# Altium PCB PCB1.PcbDoc
Units mm, origin at the board's own origin, x right, y up, seen from the top; angles counter-clockwise.
Board outline 64.77 x 94.74 mm, 2 copper layers (Top Layer, Bottom Layer); 44 components, 81 nets, 288 pads, 75 vias.
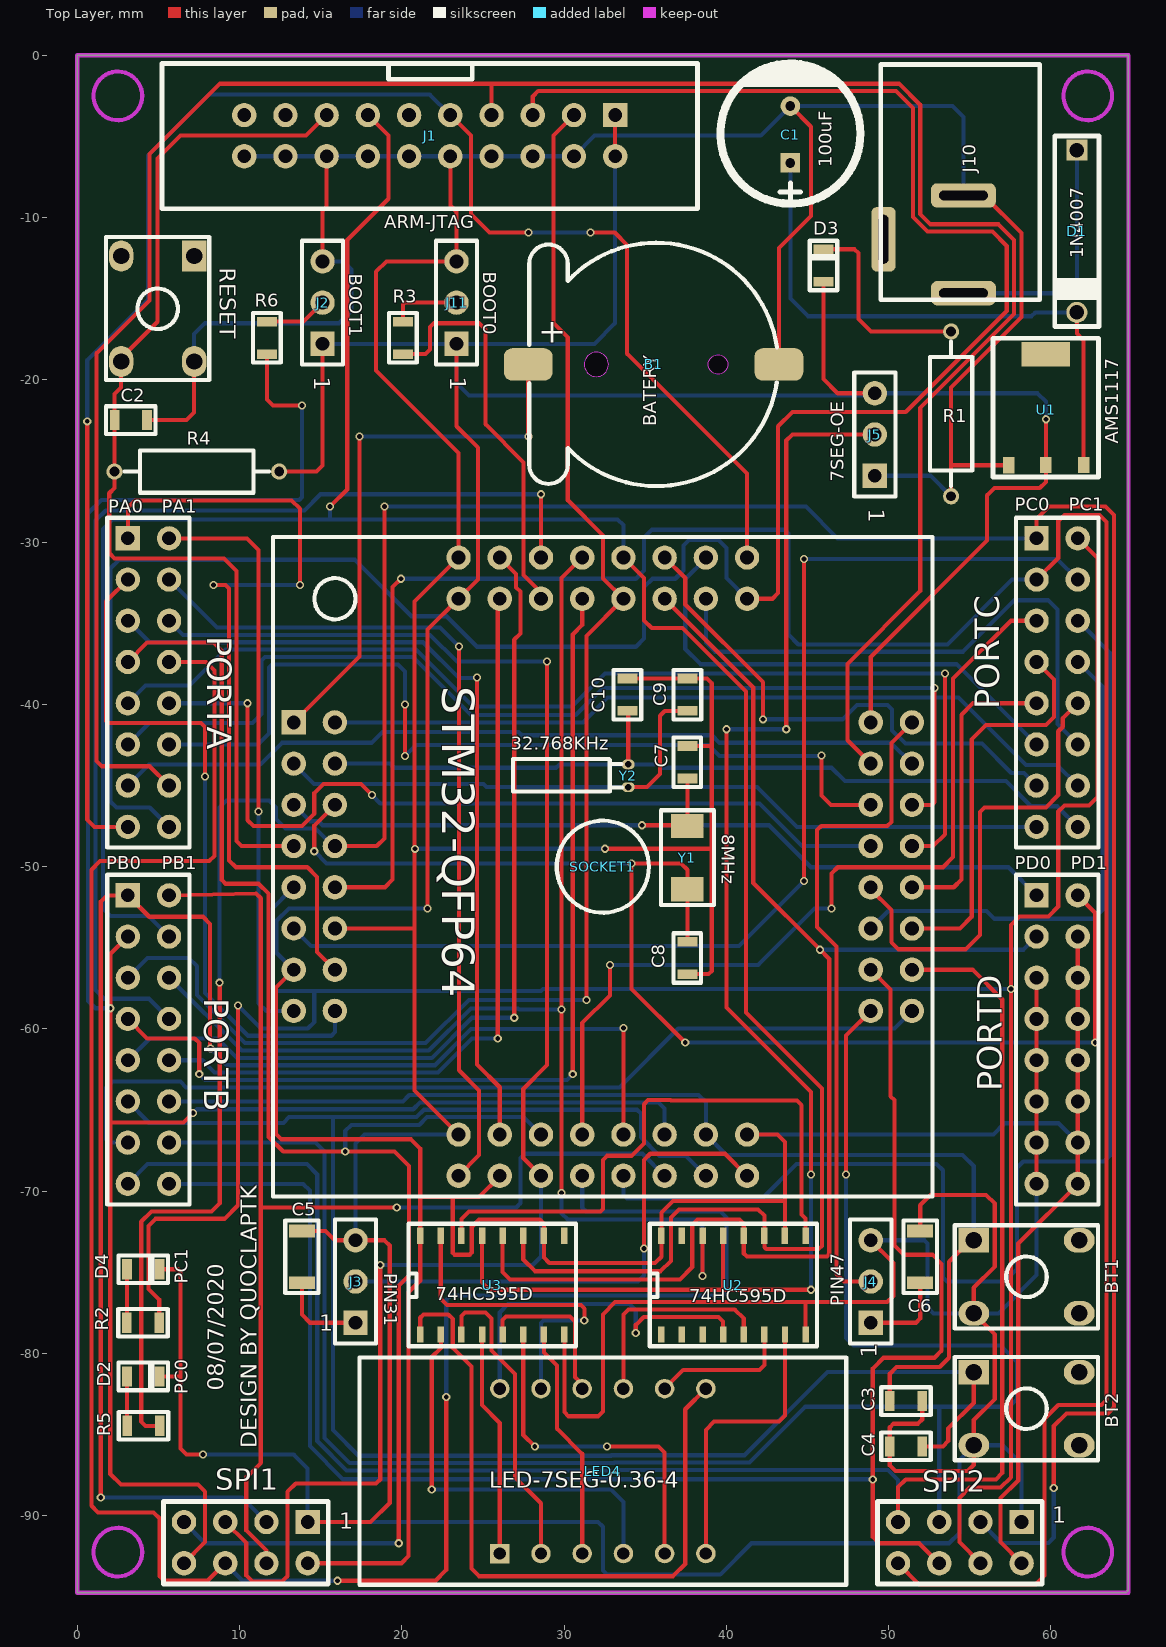
[diagram p0: Top Layer view]
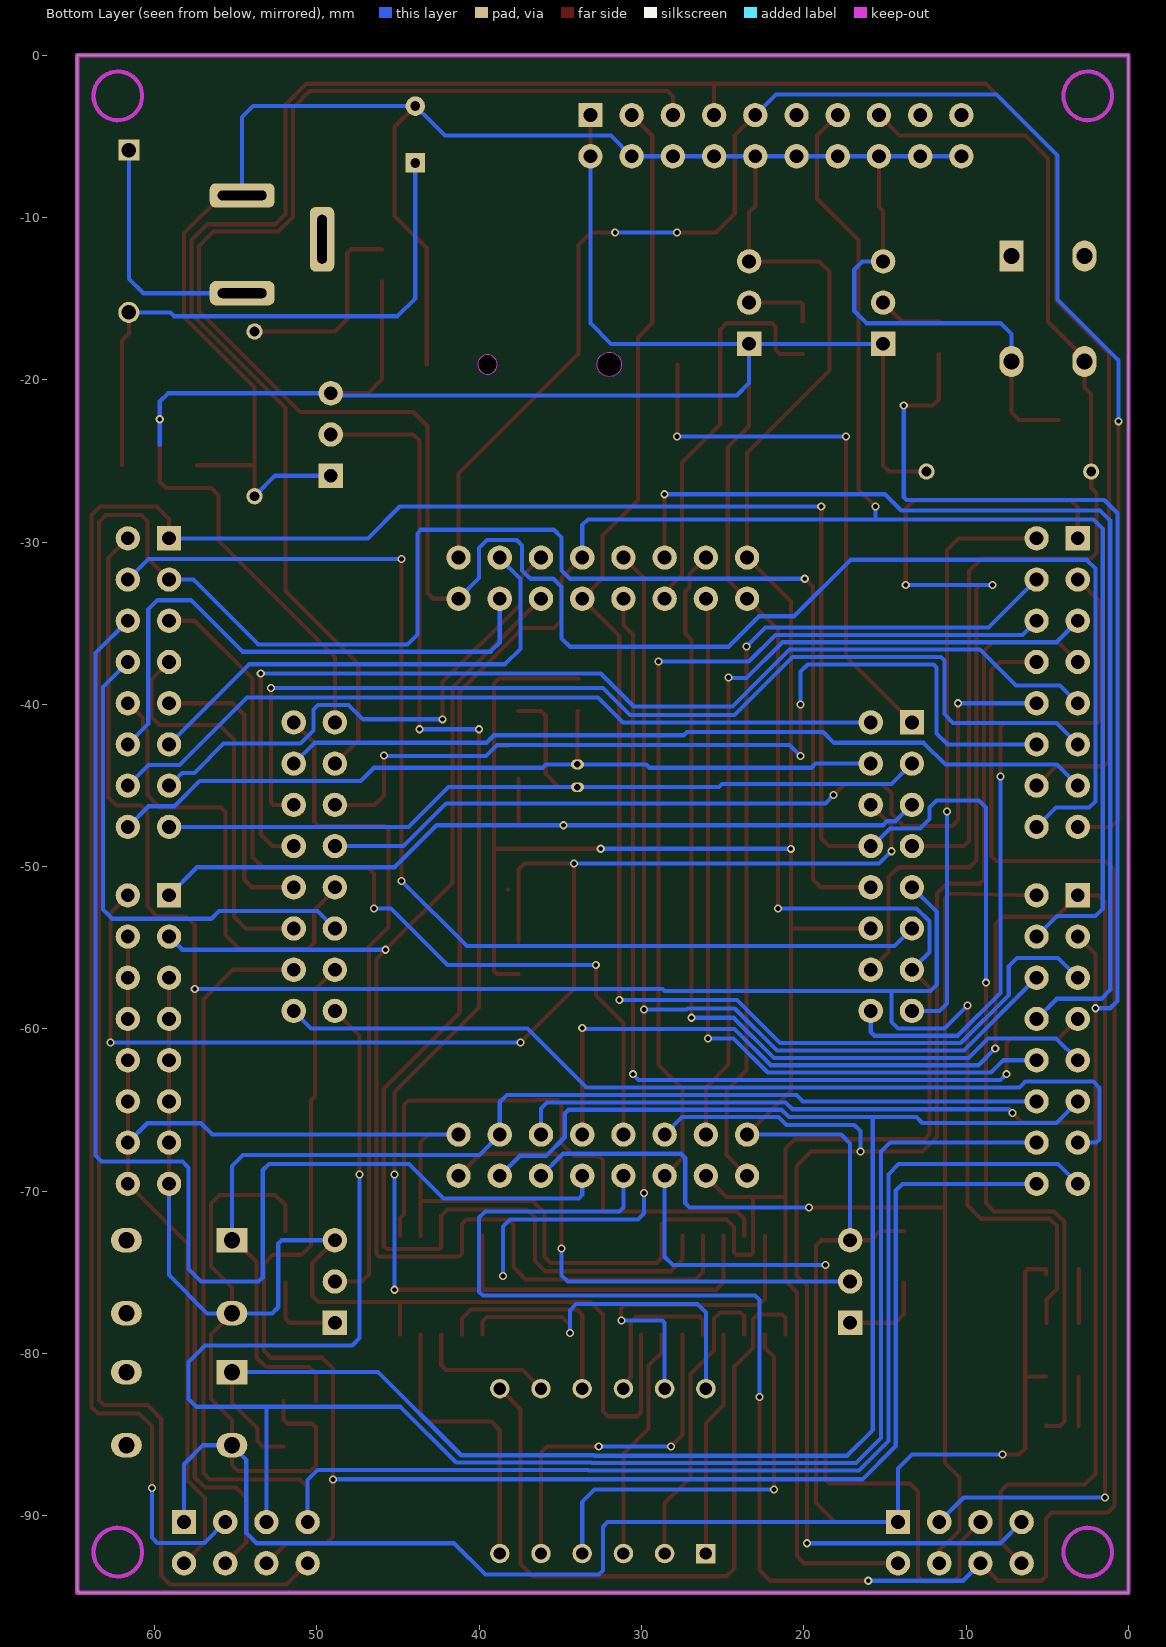
[diagram p1: Bottom Layer view, seen from below]

## Layer stack, top to bottom
Top Solder: solder mask 0.0102, Solder Resist, Dk 3.5
Top Layer: signal copper 0.0356
Dielectric 1: dielectric 0.32, FR-4, Dk 4.8
Bottom Layer: signal copper 0.0356
Bottom Solder: solder mask 0.0102, Solder Resist, Dk 3.5

## Board outline
0,-94.742 64.621,-94.742 64.77,-94.593 64.77,0 0,0

## Design rules (kind name [scope] priority, off if disabled: settings)
Clearance [All] p1: gap=0.2 ignorepadtopadclearanceinfootprint=FALSE
PolygonConnect [All] p1: connectstyle=Relief reliefconductorwidth=0.254 reliefentries=4 polygonreliefangle="90 Angle" airgapwidth=0.254
RoutingVias [All] p1: holewidth=0.3 width=0.5 viastyle="Through Hole" minholewidth=0.3 minwidth=0.5 maxholewidth=0.3 maxwidth=0.5
SolderMaskExpansion [All] p1: expansion=0.102
Width [All] p1: maxlimit=3 minlimit=0.254 preferedwidth=0.254
30 further rules are at their usual default settings.

## Components (designator, comment, footprint, x,y, rotation, side; value= is the part's Value field where it differs from the comment)
B1 "BATERY" CR1220 35.687,-19.05 r270 top
BT1 "Button Hole" BUTTON_HOLE_5.0mm 58.495,-75.275 r90 top
BT2 "Button Hole" BUTTON_HOLE_5.0mm 58.495,-83.403 r90 top
C1 "100uF" CAP_RAD_7mm 43.942,-4.826 r90 top
C2 "103" C0805 3.302,-22.479 r180 top
C3 "103" C0805 51.07,-82.931 r0 top
C4 "103" C0805 51.07,-85.725 r180 top
C5 "2.2uF" C1206 13.843,-74.041 r90 top
C6 "2.2uF" C1206 51.943,-74.041 r90 top
C7 "22pF" C0805 37.592,-43.561 r90 top
C8 "22pF" C0805 37.592,-55.626 r270 top
C9 "22pF" C0805 37.6,-39.4 r90 top
C10 "22pF" C0805 33.9,-39.4 r90 top
D1 "1N4007" DO-41 61.595,-10.842 r270 top
D2 "PC0" L0805RED 4.064,-82.042 r0 top
D3 "LED0805" L0805RED 46.609,-12.954 r90 top
D4 "PC1" L0805RED 4.064,-75.438 r0 top
J1 "ARM-JTAG" IDC_CONNECTOR_20_2.54 21.717,-4.953 r270 top
J2 "BOOT1" "Header 3x1 TH Pitch 2.54mm" 15.113,-15.24 r90 top
J3 "PIN31" "Header 3x1 TH Pitch 2.54mm" 17.145,-75.565 r90 top
J4 "PIN47" "Header 3x1 TH Pitch 2.54mm" 48.895,-75.565 r90 top
J5 "7SEG-OE" "Header 3x1 TH Pitch 2.54mm" 49.149,-23.368 r90 top
J10 "Connector" DC_K375A_Power 41.61,-7.361 r180 top
J11 "BOOT0" "Header 3x1 TH Pitch 2.54mm" 23.368,-15.24 r90 top
LED4 "LED-7SEG-0.36-4" LED-7SEG-0.36-4 32.385,-87.249 r0 top
PORTA "Header 8x2 TH Pitch 2.54mm" "Header 8x2 TH Pitch 2.54mm" 4.385,-38.657 r0 top
PORTB "Header 8x2 TH Pitch 2.54mm" "Header 8x2 TH Pitch 2.54mm" 4.385,-60.657 r0 top
PORTC "Header 8x2 TH Pitch 2.54mm" "Header 8x2 TH Pitch 2.54mm" 60.385,-38.657 r0 top
PORTD "Header 8x2 TH Pitch 2.54mm" "Header 8x2 TH Pitch 2.54mm" 60.385,-60.657 r0 top
R1 "330" RES-0.25W-H-MF 53.848,-22.098 r270 top
R2 "330" R0805 5.048,-78.105 r0 top
R3 "4k7" R0805 20.066,-18.415 r270 top
R4 "10K" RES-0.25W-H-MF 7.366,-25.654 r180 top
R5 "330" R0805 5.08,-84.455 r0 top
R6 "4k7" R0805 11.684,-18.415 r270 top
RESET "Button Hole" BUTTON_HOLE_5.0mm 4.953,-15.621 r0 top
SOCKET1 "STM32-QFP64" SOCKET-ADAPTER-OTQ-64-05-03 32.385,-50 r0 top
SPI1 "Header 4x2 TH Pitch 2.54mm" "Header 4x2 TH Pitch 2.54mm" 10.385,-91.657 r270 top
SPI2 "Header 4x2 TH Pitch 2.54mm" "Header 4x2 TH Pitch 2.54mm" 54.385,-91.657 r270 top
U1 "AMS1117" SOT223-3 59.69,-21.79 r0 top
U2 "74HC595D" SO16 40.132,-75.692 r90 top
U3 "74HC595D" SO16 25.273,-75.692 r90 top
Y1 "8MHz" SMD5032 37.592,-47.498 r90 top
Y2 "32.768KHz" DT-26 34.1,-44.4 r0 top

## Footprints (in the part's own frame and the unit in brackets; to place one, negate y for a bottom-side part, rotate by r counter-clockwise, add the part's x,y. Pads: shape width x height; smd on the part's side, far side on the other; paste and mask are expansions set on the pad)
BUTTON_HOLE_5.0mm [mm]
  rect 1.5x1.9 hole 1: 1(2.25,3.25)
  oval 1.5x1.9 hole 1: 2(2.25,-3.25) 3(-2.25,3.25) 4(-2.25,-3.25)
  silkscreen extent -3.18,-4.4 3.17,4.43, body extent -3,-3.86 3,3.86, height 5
C0805 [mm]
  rect 0.6x1.24 smd: 1(-1,0) 2(1,0)
  silkscreen extent -1.52,-0.85 1.53,0.85, body extent -1,-0.6 1,0.6, height 1
C1206 [mm]
  rect 0.8x1.6 smd: 1(-1.6,0) 2(1.6,0)
  silkscreen extent -2.22,-1.02 2.22,1.02, body extent -1.6,-0.8 1.6,0.8, height 0.75
CAP_RAD_7mm [mm]
  rect 1.2x1.2 hole 0.6: 1(-1.805,0)
  round 1.2 hole 0.6: 2(1.695,0)
  silkscreen extent -4.32,-4.32 4.32,4.31, body extent -4.06,-4 3.94,4, height 11.33
CR1220 [mm]
  rrect50% 2x3 smd: 1(0,-7.9) 2(0,7.55)
  Keep-Out Layer board cut-out: -0.75,-3.7 -0.693,-3.987 -0.53,-4.23 -0.287,-4.393 0,-4.45 0,-4.45 0.287,-4.393 0.53,-4.23 0.693,-3.987 0.75,-3.7 0.75,-3.7 0.693,-3.413 0.53,-3.17 0.287,-3.007 0,-2.95 0,-2.95 -0.287,-3.007 -0.53,-3.17 -0.693,-3.413 -0.75,-3.7
  Keep-Out Layer board cut-out: 0,3.2 -0.23,3.246 -0.424,3.376 -0.554,3.57 -0.6,3.8 -0.6,3.8 -0.554,4.03 -0.424,4.224 -0.23,4.354 0,4.4 0,4.4 0.23,4.354 0.424,4.224 0.554,4.03 0.6,3.8 0.6,3.8 0.554,3.57 0.424,3.376 0.23,3.246 0,3.2
  silkscreen extent -7.5,-7.84 7.5,7.43, body extent -7.5,-9.42 7.5,9.07, height 4.04
DC_K375A_Power [mm]
  rrect50% 4x1.5 hole 0.6 slot 3 at 0 deg: 1(-13,7.3) 2(-13,1.275)
  rrect50% 1.5x4 hole 0.6 slot 3 at 90 deg: 3(-8.075,3.975)
  silkscreen extent -17.7,-6.8 -7.9,7.7, body extent -17.7,-6.8 -7.9,7.7, height 11
DO-41 [mm]
  rect 1.3x1.3 hole 0.9: 1(-5,0)
  round 1.3 hole 0.9: 2(5,0)
  silkscreen extent -5.88,-1.36 5.88,1.36, body extent -5.43,-1.36 5.43,1.36, height 3.36
DT-26 [mm]
  oval 0.8x0.6 hole 0.4: 1(-0.15,0.7) 2(-0.15,-0.7)
  silkscreen extent -7.24,-0.98 -0.54,1.02, body extent -7.14,-1 0,1, height 2
"Header 3x1 TH Pitch 2.54mm" [mm]
  rect 1.5x1.5 hole 0.85: 1(-2.54,0)
  round 1.5 hole 0.85: 2(0,0) 3(2.54,0)
  silkscreen extent -3.81,-1.27 3.81,1.27, body extent -3.81,-1.27 3.81,1.27, height 8.89
"Header 4x2 TH Pitch 2.54mm" [mm]
  rect 1.5x1.5 hole 0.85: 1(-1.27,3.81)
  round 1.5 hole 0.85: 2(1.27,3.81) 3(-1.27,1.27) 4(1.27,1.27) 5(-1.27,-1.27) 6(1.27,-1.27) 7(-1.27,-3.81) 8(1.27,-3.81)
  silkscreen extent -2.54,-5.08 2.54,5.08, body extent -2.54,-5.08 2.54,5.08, height 8.89
"Header 8x2 TH Pitch 2.54mm" [mm]
  rect 1.5x1.5 hole 0.85: 1(-1.27,8.89)
  round 1.5 hole 0.85: 2(1.27,8.89) 3(-1.27,6.35) 4(1.27,6.35) 5(-1.27,3.81) 6(1.27,3.81) 7(-1.27,1.27) 8(1.27,1.27) 9(-1.27,-1.27) 10(1.27,-1.27) 11(-1.27,-3.81) 12(1.27,-3.81) 13(-1.27,-6.35) 14(1.27,-6.35) 15(-1.27,-8.89) 16(1.27,-8.89)
  silkscreen extent -2.54,-10.16 2.54,10.16, body extent -2.54,-10.16 2.54,10.16, height 8.89
IDC_CONNECTOR_20_2.54 [mm]
  rect 1.5x1.5 hole 0.85: 1(-1.27,11.43)
  round 1.5 hole 0.85: 2(1.27,11.43) 3(-1.27,8.89) 4(1.27,8.89) 5(-1.27,6.35) 6(1.27,6.35) 7(-1.27,3.81) 8(1.27,3.81) 9(-1.27,1.27) 10(1.27,1.27) 11(-1.27,-1.27) 12(1.27,-1.27) 13(-1.27,-3.81) 14(1.27,-3.81) 15(-1.27,-6.35) 16(1.27,-6.35) 17(-1.27,-8.89) 18(1.27,-8.89) 19(-1.27,-11.43) 20(1.27,-11.43)
  silkscreen extent -4.45,-16.5 4.5,16.5, body extent -4.47,-16.6 4.42,16.6, height 9
L0805RED [mm]
  rect 0.6x1.24 smd: 1(-1,0.625) 2(1,0.625)
  silkscreen extent -1.53,-0.23 1.52,1.47, body extent -1,0 1,1.25, height 1.1
LED-7SEG-0.36-4 [mm]
  rect 1.2x1.2 hole 0.762: 1(-6.35,-5.08)
  round 1.2 hole 0.762: 2(-3.81,-5.08) 3(-1.27,-5.08) 4(1.27,-5.08) 5(3.81,-5.08) 6(6.35,-5.08) 7(6.35,5.08) 8(3.81,5.08) 9(1.27,5.08) 10(-1.27,5.08) 11(-3.81,5.08) 12(-6.35,5.08)
  silkscreen extent -15,-7 15,7
R0805 [mm]
  rect 0.6x1.24 smd: 1(-2,0) 2(0,0)
  silkscreen extent -2.53,-0.85 0.53,0.85, body extent -2,-0.62 0,0.62, height 0.45
RES-0.25W-H-MF [mm]
  round 1 hole 0.6: 1(-5.075,0) 2(5.075,0)
  silkscreen extent -4.45,-1.3 4.45,1.3, body extent -5.35,-1.3 5.36,1.3, height 2.69
SMD5032 [mm]
  rect 1.5x2 smd: 1(-3.9,0) 2(0,0)
  silkscreen extent -4.87,-1.65 0.97,1.63, body extent -4.45,-1.6 0.55,1.6, height 1.2
SO16 [mm]
  rect 1x0.4 smd: 1(-3.137,4.14) 2(-3.137,2.87) 3(-3.137,1.6) 4(-3.137,0.33) 5(-3.137,-0.94) 6(-3.137,-2.21) 7(-3.137,-3.48) 8(-3.137,-4.75) 9(2.948,-4.748) 10(2.948,-3.478) 11(2.948,-2.208) 12(2.948,-0.938) 13(2.948,0.332) 14(2.948,1.602) 15(2.948,2.872) 16(2.948,4.142)
  silkscreen extent -3.86,-5.46 3.68,4.85, body extent -3.17,-5.29 2.97,4.68, height 1.75
SOCKET-ADAPTER-OTQ-64-05-03 [mm]
  rect 1.5x1.5 hole 0.85: 1(-19.05,8.89)
  round 1.5 hole 0.85: 2(-16.51,8.89) 3(-19.05,6.35) 4(-16.51,6.35) 5(-19.05,3.81) 6(-16.51,3.81) 7(-19.05,1.27) 8(-16.51,1.27) 9(-19.05,-1.27) 10(-16.51,-1.27) 11(-19.05,-3.81) 12(-16.51,-3.81) 13(-19.05,-6.35) 14(-16.51,-6.35) 15(-19.05,-8.89) 16(-16.51,-8.89) 17(-8.89,-19.05) 18(-8.89,-16.51) 19(-6.35,-19.05) 20(-6.35,-16.51) 21(-3.81,-19.05) 22(-3.81,-16.51) 23(-1.27,-19.05) 24(-1.27,-16.51) 25(1.27,-19.05) 26(1.27,-16.51) 27(3.81,-19.05) 28(3.81,-16.51) 29(6.35,-19.05) 30(6.35,-16.51) 31(8.89,-19.05) 32(8.89,-16.51) 33(19.05,-8.89) 34(16.51,-8.89) 35(19.05,-6.35) 36(16.51,-6.35) 37(19.05,-3.81) 38(16.51,-3.81) 39(19.05,-1.27) 40(16.51,-1.27) 41(19.05,1.27) 42(16.51,1.27) 43(19.05,3.81) 44(16.51,3.81) 45(19.05,6.35) 46(16.51,6.35) 47(19.05,8.89) 48(16.51,8.89) 49(8.89,19.05) 50(8.89,16.51) 51(6.35,19.05) 52(6.35,16.51) 53(3.81,19.05) 54(3.81,16.51) 55(1.27,19.05) 56(1.27,16.51) 57(-1.27,19.05) 58(-1.27,16.51) 59(-3.81,19.05) 60(-3.81,16.51) 61(-6.35,19.05) 62(-6.35,16.51) 63(-8.89,19.05) 64(-8.89,16.51)
  silkscreen extent -20.32,-20.32 20.32,20.32, body extent -20.32,-20.32 20.32,20.32, height 9.5
SOT223-3 [mm]
  rect 0.7x1 smd: 1(-2.3,-3.475) 2(0,-3.45) 3(2.325,-3.45)
  rect 3x1.5 smd: 4(0,3.375)
  silkscreen extent -3.25,-4.2 3.25,4.35, body extent -3.25,-3.5 3.25,3.5, height 1.7

## Part data
B1: library part Batery
C1: library part Capacitor(Radian)
C2 C3 C4 C7 C8 C9 C10: library part C0805
C5 C6: library part C1206
D2 D4: library part LED0805
J1: library part IDC_2.54_10x2
J2 J3 J4 J5 J11: library part "Header 3x1 TH Pitch 2.54mm"
J10: library part JackDC
R1 R4: library part "Resistors THD"
R2 R3 R5 R6: library part "Resistor SMD"
SOCKET1: library part SOCKET-ADAPTER-OTQ-64-05-03
U1: library part AMS1117(SOT-223)
Y1: library part Crystal
Y2: library part "Crystal 32.768KHz"

## Via types
v1: diameter 0.5, hole 0.3, Top Layer to Bottom Layer, 75 vias

## Nets (pads, with @x,y where several pads share a name; then routed paths per layer and width w, separated by ;. In a path a pad name is that pad's centre, name@x,y a point inside that pad or via, vN(x,y) a via of type N, cw(c..) or ccw(c..) an arc to the next point about the centre after c; other vN are vias at no path point)
3.3V: D3.1 J1.1 J1.2 J2.1 J5.3 J11.1 PORTD.4 PORTD.6 PORTD.8 PORTD.10 PORTD.12 PORTD.14 PORTD.16 R4.1 SOCKET1.13 SOCKET1.19 SOCKET1.32 SOCKET1.48 SOCKET1.64 SPI1.2 SPI2.2 U1.2 U2.10 U2.16 U3.10 U3.16 | length 327
  Top Layer w0.254: R4.1@12.187,-25.654 R4.1 14.732,-25.654 15.113,-25.273 J2.1 ; SOCKET1.13 12.243,-57.442 12.243,-66.472 12.573,-66.802 20.574,-66.802 21.131,-67.359 21.131,-70.358 ; SPI1.2 19.976,-92.927 20.422,-92.481 20.422,-76.225 21.131,-75.516 U3.16 21.131,-70.358 ; v1(21.59,-52.578) 21.59,-35.395 SOCKET1.64 24.689,-32.296 24.689,-24.181 23.368,-22.86 J11.1 ; SOCKET1.19 26.035,-69.088 24.765,-70.358 23.139,-70.358 ; J1.2 J1.1 ; SOCKET1.32 43.142,-66.51 43.61,-66.978 43.61,-70.612 ; U2.10 43.61,-70.612 ; D3.1 45.984,-19.949 46.863,-20.828 J5.3 ; SOCKET1.48 48.895,-37.084 56.07,-29.909 56.07,-27.114 56.515,-26.67 59.309,-26.67 59.69,-26.289 U1.2 v1(59.69,-22.425) ; SPI2.2 56.896,-91.628 56.896,-88.907 57.985,-87.818 57.985,-73.217 PORTD.16 PORTD.14 PORTD.12 PORTD.10 PORTD.8 PORTD.6 PORTD.4 ; 21.131,-70.358 23.139,-70.358 ; 23.139,-70.358 23.139,-73.812 23.241,-73.914 24.183,-73.914 24.31,-73.787 24.31,-72.21 24.765,-71.755 28.497,-71.755 28.751,-72.009 U3.10 28.751,-74.09 29.083,-74.422 35.609,-74.422 35.99,-74.041 U2.16 35.99,-71.325 36.703,-70.612 43.61,-70.612
  Bottom Layer w0.254: SOCKET1.13 12.258,-55.273 12.258,-53.364 13.044,-52.578 v1(21.59,-52.578) ; J2.1 J11.1 ; J1.2 33.147,-16.51 31.877,-17.78 J11.1 ; SOCKET1.32 56.451,-66.51 57.15,-65.811 60.46,-65.811 PORTD.14 ; 59.69,-24.003 v1(59.69,-22.425) 59.69,-21.336 59.182,-20.828 J5.3 49.022,-20.955 24.13,-20.955 23.368,-20.193 J11.1
BOOT0: R3.2 SOCKET1.60 | length 24.9
  Top Layer w0.254: R3.2 21.463,-18.415 21.742,-18.136 21.742,-16.739 21.971,-16.51 24.765,-16.51 25.146,-16.891 25.146,-22.733 27.498,-25.085 27.498,-32.029 28.575,-33.106 SOCKET1.60
BOOT1: PORTB.3 R6.2 SOCKET1.28 SPI1.8 | length 137.2
  Top Layer w0.254: PORTB.3 2.032,-55.39 v1(2.032,-58.725) 2.032,-65.761 ; SPI1.8 7.874,-91.628 7.874,-88.519 7.439,-88.084 2.694,-88.084 2.032,-87.422 2.032,-65.761 ; v1(7.137,-65.176) 6.553,-65.761 2.032,-65.761 ; R6.2 11.684,-21.209 12.065,-21.59 v1(13.843,-21.59)
  Bottom Layer w0.254: v1(2.032,-58.725) 1.118,-58.725 0.66,-58.268 0.66,-28.219 1.486,-27.394 13.678,-27.394 13.839,-27.232 13.839,-21.594 v1(13.843,-21.59) ; v1(7.137,-65.176) 7.366,-64.948 20.701,-64.948 21.124,-64.525 35.823,-64.525 36.195,-64.897 SOCKET1.28
GND: B1.2 BT1.3 BT2.3 C1.2 C2.1 C3.2 C4.2 C5.2 C6.2 C7.2 C8.2 C9.2 C10.2 D2.2 D4.2 J1.4 J1.6 J1.8 J1.10 J1.12 J1.14 J1.16 J1.18 J1.20 J2.3 J3.3 J4.3 J5.1 J10.2 J11.3 PORTD.5 PORTD.7 PORTD.9 PORTD.11 PORTD.13 PORTD.15 R1.2 RESET.2 SOCKET1.12 SOCKET1.18 SOCKET1.63 SPI1.1 SPI2.1 U1.1 U2.8 U3.8 | length 475.9
  Top Layer w0.254: C2.1 6.731,-22.479 7.203,-22.007 RESET.2 ; D2.2 6.35,-81.417 ; D4.2@5.064,-75.133 D4.2 6.201,-74.813 6.35,-74.962 6.35,-81.417 ; v1(7.747,-86.233) 6.731,-86.233 6.35,-85.852 6.35,-81.417 ; C5.2 15.291,-72.441 15.875,-73.025 J3.3 18.923,-73.025 19.253,-73.355 19.253,-89.205 18.071,-90.387 SPI1.1 ; J2.3 15.113,-9.601 15.367,-9.347 J1.16 ; SOCKET1.12 20.739,-53.81 20.777,-53.848 ; J1.10 22.987,-9.271 23.368,-9.652 J11.3 19.05,-12.7 18.415,-13.335 18.415,-19.431 23.495,-24.511 SOCKET1.63 20.777,-33.668 20.777,-53.848 ; SOCKET1.18 20.777,-63.792 20.777,-53.848 ; U3.8 30.023,-83.617 30.277,-83.871 32.08,-83.871 32.385,-83.566 32.385,-77.597 33.147,-76.835 44.958,-76.835 ; v1(32.512,-48.895) 39.1,-48.895 ; C10.2 C9.2 38.8,-38.4 39.1,-38.7 39.1,-42.561 ; C8.2 38.9,-56.626 39.1,-56.426 39.1,-48.895 ; 38.227,-42.561 39.1,-42.561 ; B1.2 43.237,-11.881 45.212,-9.906 45.212,-4.401 C1.2 ; U2.8 44.882,-76.911 44.958,-76.835 ; J4.3 50.292,-74.422 50.292,-76.454 49.911,-76.835 44.958,-76.835 ; C6.2 51.943,-70.866 52.578,-70.231 56.007,-70.231 56.54,-70.764 56.54,-74.651 55.245,-75.946 BT1.3 56.54,-78.82 56.54,-82.804 55.245,-84.099 BT2.3 55.245,-86.868 54.864,-87.249 50.419,-87.249 50.07,-86.9 C4.2 50.07,-84.55 50.292,-84.328 51.816,-84.328 52.07,-84.074 C3.2 ; R1.2 53.848,-25.265 ; J10.2 55.86,-8.636 58.185,-10.961 58.185,-16.124 53.848,-20.461 53.848,-25.265 ; U1.1 53.848,-25.265 ; PORTD.15 PORTD.13 PORTD.11 PORTD.9 PORTD.7 PORTD.5 ; 39.1,-48.895 39.1,-42.561
  Bottom Layer w0.254: RESET.2 7.203,-17.181 7.874,-16.51 16.129,-16.51 16.891,-15.748 16.891,-13.208 16.383,-12.7 J2.3 ; v1(7.747,-86.233) 13.335,-86.233 14.195,-87.093 SPI1.1 32.094,-90.387 32.385,-90.678 32.385,-93.37 32.639,-93.624 39.624,-93.624 41.554,-91.694 53.721,-91.694 54.356,-91.059 54.356,-86.563 55.245,-85.674 BT2.3 57.023,-85.653 58.195,-86.825 SPI2.1 ; J1.20 J1.18 J1.16 J1.14 J1.12 J1.10 J1.8 J1.6 J1.4 31.877,-4.953 42.12,-4.953 C1.2 53.931,-3.131 54.61,-3.81 J10.2 ; J3.3 17.145,-67.056 17.691,-66.51 SOCKET1.18 ; v1(20.8,-48.9) 20.805,-48.895 v1(32.512,-48.895) ; J4.3 52.197,-73.025 52.387,-73.215 52.387,-77.153 52.76,-77.525 BT1.3 56.765,-77.525 59.115,-75.175 PORTD.15 ; J5.1 52.583,-25.908 R1.2
JNRST: J1.3 PORTB.5 SOCKET1.56 | length 90.9
  Top Layer w0.254: J1.3 29.337,-4.953 29.337,-16.51 30.226,-17.399 30.226,-27.419 32.398,-29.591 32.398,-32.233 SOCKET1.56 31.369,-35.776 v1(31.369,-58.217)
  Bottom Layer w0.254: PORTB.5 4.336,-55.626 6.858,-55.626 7.366,-56.134 7.366,-57.912 10.329,-60.875 21.469,-60.875 24.127,-58.217 v1(31.369,-58.217)
JTCK: J1.9 PORTA.15 SOCKET1.49 | length 105.2
  Top Layer w0.254: v1(0.61,-22.555) 0.61,-47.092 1.065,-47.547 PORTA.15 ; J1.9 24.257,-4.953 24.257,-9.779 25.4,-10.922 v1(27.813,-10.922) ; v1(31.623,-10.922) 33.122,-10.922 33.884,-11.684 33.884,-18.39 41.275,-25.781 SOCKET1.49
  Bottom Layer w0.254: v1(0.61,-22.555) 0.61,-18.796 4.369,-15.037 4.369,-6.172 8.128,-2.413 21.717,-2.413 J1.9 ; v1(27.813,-10.922) v1(31.623,-10.922)
JTDI: J1.5 PORTA.16 SOCKET1.50 | length 140.1
  Top Layer w0.254: J1.5 28.067,-2.54 28.403,-2.204 50.457,-2.204 51.489,-3.236 51.489,-9.967 52.39,-10.868 56.388,-10.868 57.277,-11.757 57.277,-15.748 51.054,-21.971 44.069,-21.971 43.18,-22.86 43.18,-33.147 42.837,-33.49 SOCKET1.50
  Bottom Layer w0.254: PORTA.16 4.463,-46.355 2.413,-46.355 2.032,-45.974 2.032,-31.623 2.565,-31.09 17.12,-31.09 20.597,-34.567 22.756,-34.567 24.638,-36.449 34.417,-36.449 34.929,-35.937 34.929,-32.766 35.437,-32.258 36.848,-32.258 37.356,-31.75 37.356,-30.208 37.691,-29.873 39.525,-29.873 40.005,-30.353 40.005,-32.22 SOCKET1.50
JTDO: J1.13 PORTB.4 SOCKET1.55 U2.11 U3.11 | length 163.8
  Top Layer w0.254: v1(15.57,-27.813) 16.637,-26.746 16.637,-11.379 19.177,-8.839 19.177,-4.953 J1.13 ; U3.11 27.481,-74.217 28.194,-74.93 35.941,-74.93 36.576,-74.295 36.576,-71.628 37.084,-71.12 41.959,-71.12 42.34,-71.501 U2.11 42.34,-73.455 42.456,-73.571 45.682,-73.571 45.886,-73.367 45.886,-63.666 41.2,-58.98 41.2,-39.2 37.3,-35.3 35.4,-35.3 34.925,-34.825 34.925,-32.22 SOCKET1.55
  Bottom Layer w0.254: PORTB.4 4.383,-53.035 2.032,-53.035 1.575,-52.578 1.575,-29.185 2.159,-28.6 15.494,-28.6 ; v1(15.57,-27.813) 15.57,-28.524 15.494,-28.6 ; SOCKET1.55 33.655,-28.956 33.299,-28.6 15.494,-28.6
JTMS: J1.7 PORTA.14 SOCKET1.46 | length 145.9
  Top Layer w0.254: PORTA.14 4.463,-43.815 1.524,-43.815 1.194,-43.485 1.194,-18.364 4.454,-15.104 4.454,-6.087 8.792,-1.749 25.527,-1.749 ; J1.7 25.527,-1.749 ; SOCKET1.46 47.453,-42.209 47.453,-37.51 51.943,-33.02 51.943,-21.724 57.731,-15.936 57.731,-11.376 56.769,-10.414 52.578,-10.414 51.943,-9.779 51.943,-3.048 50.644,-1.749 25.527,-1.749
NetC1_1: C1.1 D1.2 U1.3 | length 36.6
  Top Layer w0.254: D1.2@61.595,-15.36 D1.2 61.595,-17.145 62.015,-17.565 U1.3
  Bottom Layer w0.254: C1.1 43.942,-14.986 45.034,-16.078 58.801,-16.078 59.037,-15.842 D1.2
NetC5_1: C5.1 J3.1 | length 5.5
  Top Layer w0.254: C5.1 13.843,-77.597 14.351,-78.105 J3.1
NetC6_1: C6.1 J4.1 | length 5.4
  Top Layer w0.254: J4.1 51.689,-78.105 51.943,-77.851 C6.1
NetD1_1: D1.1 J10.1 | length 15.3
  Bottom Layer w0.254: J10.1 60.706,-14.661 61.595,-13.772 D1.1
NetD2_1: D2.1 R5.1 | length 3
  Top Layer w0.254: D2.1 3.072,-81.425 3.072,-84.447 R5.1
NetD3_2: D3.2 R1.1 | length 12.3
  Top Layer w0.254: D3.2 47.895,-11.954 48.133,-12.192 48.133,-16.256 48.9,-17.023 R1.1
NetD4_1: D4.1 R2.1 | length 3.3
  Top Layer w0.254: R2.1 3.056,-78.097 3.056,-74.821 D4.1
NetJ2_2: J2.2 R6.1 | length 3.9
  Top Layer w0.254: R6.1 13.938,-16.415 J2.2
NetJ5_2: J5.2 U2.13 U3.13 | length 90.4
  Top Layer w0.254: U3.13 24.941,-75.614 25.4,-76.073 39.8,-76.073 ; U2.13 39.8,-76.073 ; v1(40.005,-41.529) 40.008,-41.532 40.008,-58.677 45.212,-63.881 v1(45.212,-68.961) ; v1(43.688,-41.529) 43.688,-23.749 44.069,-23.368 J5.2 ; v1(45.212,-76.073) 39.8,-76.073
  Bottom Layer w0.254: v1(40.005,-41.529) v1(43.688,-41.529) ; v1(45.212,-76.073) v1(45.212,-68.961)
NetJ11_2: J11.2 R3.1 | length 4.4
  Top Layer w0.254: R3.1 20.066,-15.367 20.193,-15.24 J11.2
NetLED4_1: LED4.1 U3.4 | length 14
  Top Layer w0.254: U3.4 24.943,-83.185 26.035,-84.277 LED4.1
NetLED4_2: LED4.2 U3.3 | length 19
  Top Layer w0.254: U3.3 23.673,-77.695 23.898,-77.47 25.146,-77.47 25.527,-77.851 25.527,-79.807 26.975,-81.255 26.975,-87.63 28.575,-89.23 LED4.2
NetLED4_3: LED4.3 U3.7 | length 14.5
  Top Layer w0.254: U3.7 28.753,-79.934 29.569,-80.75 29.569,-84.636 31.115,-86.182 LED4.3
NetLED4_4: LED4.4 U3.2 | length 25.1
  Top Layer w0.254: v1(21.844,-88.392) 21.844,-80.228 22.403,-79.669 U3.2
  Bottom Layer w0.254: v1(21.844,-88.392) 32.893,-88.392 33.655,-89.154 LED4.4
NetLED4_5: LED4.5 U3.6 | length 21.6
  Top Layer w0.254: U3.6 27.483,-85.014 v1(28.194,-85.725) ; v1(32.639,-85.725) 35.814,-85.725 36.195,-86.106 LED4.5
  Bottom Layer w0.254: v1(28.194,-85.725) v1(32.639,-85.725)
NetLED4_6: LED4.6 U2.7 | length 17.9
  Top Layer w0.254: LED4.6 38.735,-84.709 39.243,-84.201 43.231,-84.201 43.612,-83.82 U2.7
NetLED4_7: LED4.7 U3.1 | length 44.1
  Top Layer w0.254: U3.1 21.133,-77.8 21.336,-77.597 22.86,-77.597 23.139,-77.876 23.139,-79.654 24.282,-80.797 24.282,-93.243 24.765,-93.726 36.703,-93.726 37.465,-92.964 37.465,-83.439 LED4.7
NetLED4_8: LED4.8 U2.6 | length 8.6
  Top Layer w0.254: LED4.8 37.338,-81.026 42.037,-81.026 42.342,-80.721 U2.6
NetLED4_9: LED4.9 U2.5 | length 13.3
  Top Layer w0.254: LED4.9 33.655,-77.597 33.963,-77.289 40.513,-77.289 41.072,-77.848 U2.5
NetLED4_10: LED4.10 U3.5 | length 9.9
  Top Layer w0.254: U3.5 26.213,-77.927 26.416,-77.724 30.353,-77.724 30.665,-78.036 30.665,-81.463 31.115,-81.913 LED4.10
NetLED4_11: LED4.11 U3.15 | length 20.5
  Top Layer w0.254: U3.15 22.401,-76.63 22.787,-77.016 31.042,-77.016 31.267,-77.241 v1@31.267,-77.978
  Bottom Layer w0.254: LED4.11 28.575,-78.127 28.724,-77.978 v1(31.242,-77.978)
NetLED4_12: LED4.12 U2.4 | length 21.9
  Top Layer w0.254: v1(34.417,-78.74) 34.417,-78.232 34.906,-77.743 39.516,-77.743 39.802,-78.029 U2.4
  Bottom Layer w0.254: LED4.12 26.035,-77.47 26.543,-76.962 34.036,-76.962 34.417,-77.343 v1(34.417,-78.74)
NetU2_9: U2.9 U3.14 | length 36.5
  Top Layer w0.254: U3.14 23.671,-71.706 24.13,-71.247 32.236,-71.247 32.385,-71.098 32.385,-68.072 32.639,-67.818 34.163,-67.818 34.925,-67.056 34.925,-64.643 35.179,-64.389 36.551,-64.389 36.576,-64.414 44.348,-64.414 44.635,-64.701 44.635,-71.432 44.88,-71.677 U2.9
PA0: PORTA.1 SOCKET1.14 | length 52.8
  Top Layer w0.254: PORTA.1 3.115,-27.873 3.556,-27.432 13.208,-27.432 13.716,-27.94 v1(13.716,-32.639) ; v1(8.382,-32.639) 9.144,-32.639 9.359,-32.854 9.359,-49.618 9.779,-50.038 14.173,-50.038 14.783,-50.648 14.783,-55.258 SOCKET1.14
  Bottom Layer w0.254: v1(8.382,-32.639) v1(13.716,-32.639)
PA1: PORTA.2 SOCKET1.15 | length 36.1
  Top Layer w0.254: PORTA.2 10.463,-29.767 11.176,-30.48 v1(11.176,-46.609)
  Bottom Layer w0.254: v1(11.176,-46.609) 11.176,-58.42 11.646,-58.89 SOCKET1.15
PA2: PORTA.3 SOCKET1.16 | length 42.4
  Top Layer w0.254: PORTA.3 1.778,-33.644 1.778,-41.021 1.905,-41.148 7.62,-41.148 7.874,-41.402 v1(7.874,-44.45)
  Bottom Layer w0.254: v1(7.874,-44.45) 7.874,-57.778 10.517,-60.421 15.652,-60.421 15.875,-60.198 SOCKET1.16
PA3: PORTA.4 SOCKET1.17 | length 53.2
  Top Layer w0.254: SOCKET1.17 24.765,-67.78 24.765,-63.791 23.52,-62.547 v1(23.52,-36.424)
  Bottom Layer w0.254: PORTA.4 8.607,-35.258 22.355,-35.258 v1(23.52,-36.424)
PA4: PORTA.5 SOCKET1.20 | length 51.7
  Top Layer w0.254: v1(24.638,-38.354) 24.638,-62.197 26.035,-63.594 SOCKET1.20
  Bottom Layer w0.254: PORTA.5 4.438,-36.17 21.311,-36.17 23.52,-38.379 24.613,-38.379 v1(24.638,-38.354)
PA5: PORTA.6 SOCKET1.21 SPI1.5 | length 103.3
  Top Layer w0.254: SPI1.5 10.414,-91.686 10.414,-93.675 10.795,-94.056 12.624,-94.056 12.954,-93.726 12.954,-88.519 13.462,-88.011 18.415,-88.011 18.669,-87.757 v1(18.669,-74.549) ; SOCKET1.21 27.483,-67.958 27.483,-63.703 28.956,-62.23 v1(28.956,-37.363)
  Bottom Layer w0.254: PORTA.6 6.521,-35.712 21.742,-35.712 23.393,-37.363 v1(28.956,-37.363) ; v1(18.669,-74.549) 28.067,-74.549 28.575,-74.041 SOCKET1.21
PA6: PORTA.7 SOCKET1.22 SPI1.7 | length 99.6
  Top Layer w0.254: PORTA.7 4.307,-36.195 8.382,-36.195 8.905,-36.718 8.905,-50.815 9.144,-51.054 11.176,-51.054 11.789,-51.667 11.789,-66.66 12.693,-67.564 v1(16.51,-67.564) 19.558,-67.564 20.447,-68.453 20.447,-75.184 19.812,-75.819 v1(19.812,-91.694)
  Bottom Layer w0.254: SPI1.7 7.882,-91.694 v1(19.812,-91.694) ; v1(16.51,-67.564) 16.51,-66.294 16.891,-65.913 21.074,-65.913 21.554,-65.433 27.498,-65.433 SOCKET1.22
PA7: PORTA.8 SOCKET1.23 SPI1.6 | length 138.4
  Top Layer w0.254: PORTA.8 7.923,-37.387 8.451,-37.915 8.451,-49.334 8.128,-49.657 1.397,-49.657 0.864,-50.19 0.864,-89.383 1.27,-89.789 4.699,-89.789 5.08,-90.17 5.08,-93.726 5.359,-94.005 8.037,-94.005 SPI1.6 ; v1(16.027,-94.005) 22.073,-94.005 22.733,-93.345 v1(22.733,-82.677)
  Bottom Layer w0.254: SPI1.6 10.193,-94.005 v1(16.027,-94.005) ; v1(22.733,-82.677) 22.733,-76.708 23.012,-76.429 39.776,-76.429 40.005,-76.2 40.005,-71.628 39.624,-71.247 31.369,-71.247 31.115,-70.993 SOCKET1.23
PA8: PORTA.9 SOCKET1.41 | length 66.3
  Top Layer w0.254: SOCKET1.41 52.743,-48.73 53.467,-48.006 v1(53.467,-38.1)
  Bottom Layer w0.254: PORTA.9 4.205,-38.837 6.924,-38.837 9.137,-36.624 20.876,-36.624 24.384,-40.132 30.48,-40.132 32.512,-38.1 v1(53.467,-38.1)
PA9: PORTA.10 SOCKET1.42 | length 54
  Top Layer w0.254: v1(10.492,-39.927) 10.492,-47.139 10.851,-47.498 13.843,-47.498 14.605,-46.736 14.605,-45.466 15.164,-44.907 17.475,-44.907 v1(18.161,-45.593)
  Bottom Layer w0.254: PORTA.10 v1(10.492,-39.927) ; v1(18.161,-45.593) 18.668,-46.1 42.036,-46.1 44.666,-48.73 SOCKET1.42
PA10: PORTA.11 SOCKET1.43 | length 64.6
  Top Layer w0.254: SOCKET1.43 52.675,-46.19 52.832,-46.033 v1(52.832,-38.989)
  Bottom Layer w0.254: PORTA.11 4.434,-41.148 10.795,-41.148 11.34,-40.603 11.34,-37.301 11.557,-37.084 20.694,-37.084 24.266,-40.656 30.718,-40.656 32.385,-38.989 v1(52.832,-38.989)
PA11: PORTA.12 SOCKET1.44 | length 56.3
  Top Layer w0.254: v1(20.193,-43.18) v1(20.193,-40.005) ; v1(45.859,-43.155) 45.859,-45.605 46.444,-46.19 SOCKET1.44
  Bottom Layer w0.254: PORTA.12 11.127,-42.467 11.811,-41.783 11.811,-37.719 11.992,-37.538 19.758,-37.538 20.193,-37.973 v1(20.193,-40.005) ; v1(20.193,-43.18) 20.873,-42.5 38.9,-42.5 39.58,-43.18 45.834,-43.18 v1(45.859,-43.155)
PA12: PORTA.13 SOCKET1.45 | length 50.5
  Bottom Layer w0.254: PORTA.13 4.409,-43.713 11.278,-43.713 12.624,-42.367 18.133,-42.367 18.8,-41.7 27.2,-41.7 27.4,-41.9 39.1,-41.9 39.567,-42.367 50.152,-42.367 SOCKET1.45
PB0: PORTB.1 SOCKET1.26 SPI1.3 | length 96.4
  Top Layer w0.254: v1(1.448,-88.875) 1.448,-52.146 1.827,-51.767 PORTB.1 4.434,-53.086 7.747,-53.086 8.186,-53.525 8.186,-61.196 v1(8.204,-61.214) ; SOCKET1.26 v1(33.655,-59.944)
  Bottom Layer w0.254: v1(1.448,-88.875) 10.143,-88.875 SPI1.3 ; v1(8.204,-61.214) 9.227,-62.237 22.033,-62.237 24.268,-60.002 v1@33.586,-60.002 ; v1@33.591,-60.008 v1@33.655,-60.071 ; v1(33.655,-59.944) v1@33.655,-59.817
PB1: PORTB.2 SOCKET1.27 SPI1.4 | length 76.1
  Top Layer w0.254: PORTB.2 11.017,-51.657 11.307,-51.947 11.307,-70.993 ; SPI1.4 11.655,-92.148 10.414,-90.907 10.414,-87.63 11.307,-86.737 11.307,-70.993 ; v1(19.685,-70.993) 11.307,-70.993
  Bottom Layer w0.254: v1(19.685,-70.993) 27.051,-70.993 27.305,-70.739 27.305,-67.945 27.559,-67.691 34.836,-67.691 SOCKET1.27
PB5: PORTB.6 SOCKET1.57 U2.14 | length 82.7
  Top Layer w0.254: v1(29.845,-70.104) v1(29.845,-58.801) 29.845,-32.22 SOCKET1.57 ; v1(38.53,-75.235) U2.14
  Bottom Layer w0.254: PORTB.6 10.137,-61.329 21.657,-61.329 24.254,-58.732 27.163,-58.732 27.232,-58.801 v1(29.845,-58.801) ; v1(29.845,-70.104) 29.845,-71.374 30.226,-71.755 38.1,-71.755 38.53,-72.185 v1(38.53,-75.235)
PB6: PORTB.7 SOCKET1.58 | length 59.8
  Top Layer w0.254: PORTB.7 4.307,-60.579 7.239,-60.579 7.518,-60.858 v1(7.518,-62.789) ; v1(30.531,-62.789) 30.531,-35.684 31.115,-35.1 SOCKET1.58
  Bottom Layer w0.254: v1(7.518,-62.789) 7.875,-63.145 30.175,-63.145 v1(30.531,-62.789)
PB7: PORTB.8 SOCKET1.59 | length 66.2
  Top Layer w0.254: SOCKET1.59 v1(28.575,-27.051)
  Bottom Layer w0.254: PORTB.8 4.409,-58.141 1.651,-58.141 1.118,-57.607 1.118,-28.677 1.753,-28.042 13.995,-28.042 14.986,-27.051 v1(28.575,-27.051)
PB8: PORTB.9 SOCKET1.61 | length 54.9
  Top Layer w0.254: SOCKET1.61 27.044,-31.959 27.044,-32.786 27.305,-33.047 27.305,-35.636 26.924,-36.017 v1(26.924,-59.309)
  Bottom Layer w0.254: PORTB.9 4.463,-60.579 8.636,-60.579 9.84,-61.783 21.845,-61.783 24.319,-59.309 v1(26.924,-59.309)
PB9: PORTB.10 SOCKET1.62 | length 48.6
  Top Layer w0.254: v1(25.908,-60.579) 25.908,-33.617 SOCKET1.62
  Bottom Layer w0.254: PORTB.10 7.698,-61.927 8.462,-62.691 22.221,-62.691 24.333,-60.579 v1(25.908,-60.579)
PB10: BT2.1 C4.1 PORTB.11 SOCKET1.29 | length 107.2
  Top Layer w0.254: C4.1 53.34,-85.725 53.67,-85.395 53.67,-84.633 55.245,-83.058 BT2.1
  Bottom Layer w0.254: PORTB.11 4.434,-65.786 12.7,-65.786 13.053,-65.433 15.748,-65.433 ; SOCKET1.29 37.503,-67.818 35.875,-67.818 34.732,-66.675 34.732,-65.212 34.499,-64.979 21.366,-64.979 20.912,-65.433 15.748,-65.433 ; BT2.1 46.228,-81.153 41.109,-86.272 32.908,-86.272 32.878,-86.302 17.341,-86.302 15.748,-84.709 15.748,-65.433
PB11: BT1.1 C3.1 PORTB.12 SOCKET1.30 | length 71
  Top Layer w0.254: C3.1 50.07,-81.248 50.482,-80.835 53.149,-80.835 53.721,-80.264 53.721,-74.349 55.045,-73.025 BT1.1
  Bottom Layer w0.254: PORTB.12 20.062,-64.467 20.458,-64.071 38.29,-64.071 38.735,-64.516 SOCKET1.30 39.992,-67.767 54.559,-67.767 55.245,-68.453 BT1.1
PB12: PORTB.13 SOCKET1.33 | length 56.5
  Bottom Layer w0.254: PORTB.13 1.983,-67.007 1.778,-66.802 1.778,-63.627 2.159,-63.246 6.35,-63.246 6.703,-63.599 33.404,-63.599 37.033,-59.969 50.356,-59.969 SOCKET1.33
PB13: PORTB.14 SOCKET1.34 SPI2.5 | length 113.7
  Top Layer w0.254: v1(47.371,-68.961) 47.371,-60.414 SOCKET1.34
  Bottom Layer w0.254: PORTB.14 14.683,-67.007 15.24,-67.564 15.24,-85.21 16.786,-86.756 33.066,-86.756 33.096,-86.726 41.417,-86.726 44.856,-83.287 53.086,-83.287 ; v1(47.371,-68.961) 47.371,-79.045 47.828,-79.502 56.896,-79.502 57.912,-80.518 57.912,-82.804 57.429,-83.287 53.086,-83.287 ; SPI2.5 53.115,-83.316 53.086,-83.287
PB14: PORTB.15 SOCKET1.35 SPI2.7 | length 112.7
  Top Layer w0.254: SPI2.7 50.575,-88.236 51.054,-87.757 56.617,-87.757 56.998,-87.376 56.998,-58.169 55.179,-56.35 SOCKET1.35
  Bottom Layer w0.254: PORTB.15 4.336,-68.326 14.151,-68.326 14.786,-68.961 14.786,-85.398 16.598,-87.21 33.269,-87.21 33.298,-87.18 49.969,-87.18 50.575,-87.786 SPI2.7
PB15: PORTB.16 SOCKET1.36 SPI2.6 | length 106.3
  Top Layer w0.254: SOCKET1.36 50.12,-57.576 50.12,-64.151 50.358,-64.389 50.358,-73.345 50.927,-73.914 52.705,-73.914 53.267,-74.476 53.267,-79.829 52.832,-80.264 49.682,-80.264 49.022,-80.924 v1(49.022,-87.757) 49.022,-91.313 49.403,-91.694 51.882,-91.694 SPI2.6
  Bottom Layer w0.254: PORTB.16 13.921,-69.547 14.332,-69.958 14.332,-85.706 16.38,-87.754 49.019,-87.754 v1(49.022,-87.757)
PC0: PORTC.1 R5.2 SOCKET1.8 SPI2.3 | length 194.6
  Top Layer w0.254: R5.2 5.058,-84.477 4.213,-84.477 3.937,-84.201 3.937,-71.882 4.572,-71.247 8.273,-71.247 8.781,-70.739 8.781,-57.168 v1(8.763,-57.15) ; SOCKET1.8 18.453,-48.73 18.923,-48.26 v1(18.923,-27.813) ; PORTC.1 59.115,-28.575 59.877,-27.813 63.373,-27.813 63.886,-28.326 63.886,-83.312 63.505,-83.693 60.96,-83.693 60.173,-84.48 v1(60.173,-88.29)
  Bottom Layer w0.254: v1(8.763,-57.15) 8.763,-46.355 9.195,-45.923 11.811,-45.923 12.243,-46.355 12.243,-47.069 12.827,-47.653 14.678,-47.653 15.755,-48.73 SOCKET1.8 ; v1(18.923,-27.813) 44.898,-27.813 46.852,-29.767 PORTC.1 ; SPI2.3 56.937,-91.669 59.842,-91.669 60.173,-91.338 v1(60.173,-88.29)
PC1: PORTC.2 R2.2 SOCKET1.9 SPI2.4 | length 155.3
  Top Layer w0.254: R2.2 5.048,-76.676 4.391,-76.019 4.391,-72.136 4.826,-71.701 9.071,-71.701 9.906,-70.866 v1(9.906,-58.547) ; SPI2.4 54.356,-91.628 54.356,-88.9 54.991,-88.265 56.896,-88.265 57.531,-87.63 v1(57.531,-57.531) 57.531,-53.594 58.064,-53.061 59.842,-53.061 60.452,-52.451 60.452,-46.609 60.833,-46.228 62.357,-46.228 62.865,-45.72 62.865,-30.977 PORTC.2
  Bottom Layer w0.254: v1(9.906,-58.547) 11.326,-59.967 14.201,-59.967 14.605,-59.563 14.605,-57.658 ; SOCKET1.9 11.804,-52.801 11.804,-57.27 12.192,-57.658 14.605,-57.658 ; v1(57.531,-57.531) 28.702,-57.531 28.575,-57.658 14.605,-57.658
PC2: PORTC.3 SOCKET1.10 SPI2.8 | length 157.7
  Top Layer w0.254: SOCKET1.10 18.961,-51.27 19.431,-50.8 19.431,-32.766 v1(19.939,-32.258) ; SPI2.8 51.882,-94.234 59.055,-94.234 59.596,-93.693 59.596,-84.041 60.452,-83.185 63.119,-83.185 63.432,-82.872 63.432,-28.761 62.992,-28.321 60.833,-28.321 60.452,-28.702 60.452,-30.97 PORTC.3
  Bottom Layer w0.254: v1(19.939,-32.258) 34.417,-32.258 34.925,-31.75 34.925,-29.718 35.408,-29.235 43.586,-29.235 43.815,-29.464 43.815,-35.687 44.428,-36.3 53.616,-36.3 57.609,-32.307 PORTC.3
PC3: PORTC.4 SOCKET1.11 | length 70.8
  Top Layer w0.254: v1(44.78,-50.876) v1(44.78,-31.039)
  Bottom Layer w0.254: SOCKET1.11 14.415,-54.889 40.767,-54.889 v1(44.78,-50.876) ; v1(44.78,-31.039) 60.387,-31.039 PORTC.4
PC4: PORTC.5 SOCKET1.24 | length 53.9
  Top Layer w0.254: SOCKET1.24 31.115,-59.639 32.817,-57.937 v1(32.817,-56.058) ; v1(46.482,-52.578) 46.482,-50.419 46.863,-50.038 53.34,-50.038 53.975,-49.403 53.975,-38.408 57.536,-34.847 PORTC.5
  Bottom Layer w0.254: v1(32.817,-56.058) 41.961,-56.058 45.441,-52.578 v1(46.482,-52.578)
PC5: PORTC.6 SOCKET1.25 | length 79.7
  Bottom Layer w0.254: SOCKET1.25 33.655,-70.231 33.863,-70.439 42.21,-70.439 44.323,-68.326 52.959,-68.326 53.34,-68.707 53.34,-75.311 53.594,-75.565 57.15,-75.565 57.912,-74.803 57.912,-68.555 58.293,-68.174 63.271,-68.174 63.652,-67.793 63.652,-36.844 PORTC.6
PC6: PORTC.7 SOCKET1.37 | length 24.4
  Top Layer w0.254: SOCKET1.37 54.394,-53.81 55.118,-53.086 55.118,-42.164 56.007,-41.275 59.69,-41.275 60.198,-40.767 60.198,-38.47 PORTC.7
PC7: PORTC.8 SOCKET1.38 | length 31.1
  Bottom Layer w0.254: SOCKET1.38 49.975,-52.73 56.032,-52.73 56.515,-53.213 62.611,-53.213 63.195,-52.629 63.195,-38.927 PORTC.8
PC8: PORTC.9 SOCKET1.39 | length 18.3
  Top Layer w0.254: SOCKET1.39 54.013,-51.27 54.483,-50.8 54.483,-40.64 55.196,-39.927 PORTC.9
PC9: PORTC.10 SOCKET1.40 | length 28.9
  Top Layer w0.254: SOCKET1.40 48.895,-51.413 50.165,-52.683 50.165,-54.661 50.597,-55.093 54.737,-55.093 55.626,-54.204 55.626,-46.634 55.905,-46.355 59.69,-46.355 60.452,-45.593 60.452,-41.656 60.731,-41.377 60.731,-40.851 PORTC.10
PC10: PORTC.11 SOCKET1.51 | length 30.2
  Bottom Layer w0.254: SOCKET1.51 38.735,-31.013 37.465,-32.284 37.465,-36.576 38.412,-37.523 54.171,-37.523 PORTC.11
PC11: PORTC.12 SOCKET1.52 | length 35
  Bottom Layer w0.254: SOCKET1.52 38.735,-36.195 39.294,-36.754 54.585,-36.754 57.76,-33.579 59.817,-33.579 60.401,-34.163 60.401,-41.213 PORTC.12
PC12: PORTC.13 SOCKET1.53 | length 32.5
  Top Layer w0.254: SOCKET1.53 37.465,-32.22 37.465,-33.833 42.266,-38.633 v1(42.266,-40.919)
  Bottom Layer w0.254: v1(42.266,-40.919) 47.168,-40.919 48.054,-40.033 49.939,-40.033 50.216,-40.31 50.216,-41.605 51.029,-42.418 55.753,-42.418 57.556,-44.221 58.33,-44.221 PORTC.13
PC13: PORTC.14 SOCKET1.2 | length 48.7
  Bottom Layer w0.254: SOCKET1.2 31.153,-41.11 32.684,-39.579 54.311,-39.579 58.471,-43.739 60.387,-43.739 PORTC.14
PC14: C9.1 PORTC.15 SOCKET1.3 Y2.2 | length 55.1
  Top Layer w0.254: Y2.2 35.1,-45.1 35.9,-44.3 35.9,-40.7 36.2,-40.4 C9.1
  Bottom Layer w0.254: SOCKET1.3 14.592,-44.907 25.032,-44.907 25.225,-45.1 Y2.2 41.9,-45.1 44.347,-47.547 PORTC.15
PC15: C10.1 PORTC.16 SOCKET1.4 Y2.1 | length 50.9
  Top Layer w0.254: C10.1 33.95,-40.45 Y2.1
  Bottom Layer w0.254: SOCKET1.4 19.266,-43.65 19.522,-43.906 29.5,-43.906 29.706,-43.7 Y2.1 35.894,-43.7 36.1,-43.906 46.478,-43.906 47.301,-44.729 57.226,-44.729 58.776,-46.279 60.387,-46.279 PORTC.16
PD0: C7.1 PORTD.1 SOCKET1.5 Y1.2 | length 53.8
  Top Layer w0.254: v1(34.798,-47.447) 37.592,-47.447 C7.1
  Bottom Layer w0.254: SOCKET1.5 14.344,-47.199 14.866,-47.199 15.114,-47.447 v1(34.798,-47.447) 42.621,-47.447 45.212,-50.038 57.386,-50.038 PORTD.1
PD1: C8.1 PORTD.2 SOCKET1.6 Y1.1 | length 78.5
  Top Layer w0.254: v1(14.605,-49.047) 14.605,-47.46 SOCKET1.6 ; v1(37.465,-60.833) 34.163,-57.531 v1(34.163,-49.809) 37.211,-49.809 37.592,-50.19 Y1.1 C8.1 ; PORTD.2 62.732,-52.844 v1(62.732,-60.833)
  Bottom Layer w0.254: v1(14.605,-49.047) 15.367,-49.809 v1(34.163,-49.809) ; v1(37.465,-60.833) v1(62.732,-60.833)
PD2: PORTD.3 SOCKET1.54 U2.12 U3.12 | length 85.9
  Top Layer w0.254: U3.12 26.211,-74.979 26.67,-75.438 37.135,-75.438 37.897,-74.676 37.897,-72.085 38.227,-71.755 40.805,-71.755 41.07,-72.02 U2.12 41.07,-73.836 41.259,-74.025 46.191,-74.025 46.34,-73.876 46.34,-55.687 v1(45.771,-55.118) 41.656,-51.003 41.656,-38.951 SOCKET1.54
  Bottom Layer w0.254: v1(45.771,-55.118) 58.304,-55.118 PORTD.3
PIN31: J3.2 SOCKET1.31 | length 32.1
  Top Layer w0.254: v1(34.925,-73.533) 34.925,-68.072 35.306,-67.691 39.916,-67.691 SOCKET1.31
  Bottom Layer w0.254: J3.2 34.544,-75.565 34.925,-75.184 v1(34.925,-73.533)
PIN47: J4.2 SOCKET1.47 | length 41.6
  Top Layer w0.254: J4.2 47.244,-75.565 46.794,-75.115 46.794,-54.922 45.593,-53.721 45.593,-47.752 45.847,-47.498 49.911,-47.498 50.165,-47.244 50.165,-42.38 SOCKET1.47
RESET: C2.2 J1.15 R4.2 RESET.4 SOCKET1.7 | length 65.7
  Top Layer w0.254: SOCKET1.7 10.122,-48.73 9.813,-48.421 9.813,-31.784 9.029,-31 2.286,-31 1.968,-30.682 1.968,-26.987 2.286,-26.67 2.286,-25.659 R4.2 2.296,-25.649 2.296,-22.485 C2.2 2.302,-20.879 2.703,-20.478 RESET.4 2.703,-18.669 4.953,-16.419 4.953,-6.35 6.35,-4.953 14.097,-4.953 J1.15
VBAT: B1.1 SOCKET1.1 | length 34.2
  Top Layer w0.254: SOCKET1.1 17.399,-37.046 v1(17.399,-23.495) ; B1.1 27.787,-23.469 v1(27.813,-23.495)
  Bottom Layer w0.254: v1(17.399,-23.495) v1(27.813,-23.495)
pads on no net: BT1.2 BT1.4 BT2.2 BT2.4 J1.11 J1.17 J1.19 J10.3 RESET.1 RESET.3 U1.4 U2.1 U2.2 U2.3 U2.15 U3.9

## Keep-outs
Keep-Out Layer:
  circle w0.254: c62.27,-92.242 r1.5
  circle w0.254: c2.5,-92.242 r1.5
  circle w0.254: c2.5,-2.5 r1.5
  circle w0.254: c62.27,-2.5 r1.5
  lines w0.254: 0,-94.742 0,0 64.77,0 64.77,-94.742 0,-94.742

## Silkscreen, mask and mechanical layers (free items; w line width, h text height)
Top Overlay:
  text "+" at 28.4,-17.7 h1.5
  text "1" at 14.605,-19.812 h1 r270
  text "1" at 22.987,-19.812 h1 r270
  text "1" at 48.768,-27.94 h1 r270
  text "PC0" at 57.785,-28.067 h0.8
  text "PC1" at 61.087,-28.067 h0.8
  text "PA0" at 1.905,-28.194 h0.8
  text "PA1" at 5.207,-28.194 h0.8
  text "PB0" at 1.778,-50.165 h0.8
  text "PB1" at 5.207,-50.165 h0.8
  text "PD0" at 57.785,-50.165 h0.8
  text "PD1" at 61.214,-50.165 h0.8
  text "1" at 14.9,-78.6 h1
  text "1" at 49.276,-80.264 h1 r90
  text "08/07/2020" at 9.017,-82.296 h1 r90
  text "DESIGN BY QUOCLAPTK" at 11.049,-85.852 h1 r90
  text "1" at 60.071,-90.424 h1
  text "1" at 16.129,-90.805 h1